# Altium PCB NexitonAdapterBoard.PcbDoc
Units mil, origin at the board's own origin, x right, y up, seen from the top; angles counter-clockwise.
Board outline 960 x 1060 mil, 2 copper layers (Top Layer, Bottom Layer); 16 components, 20 nets, 50 pads, 1 vias.
Unrouted connection lines stored in the file: 10.
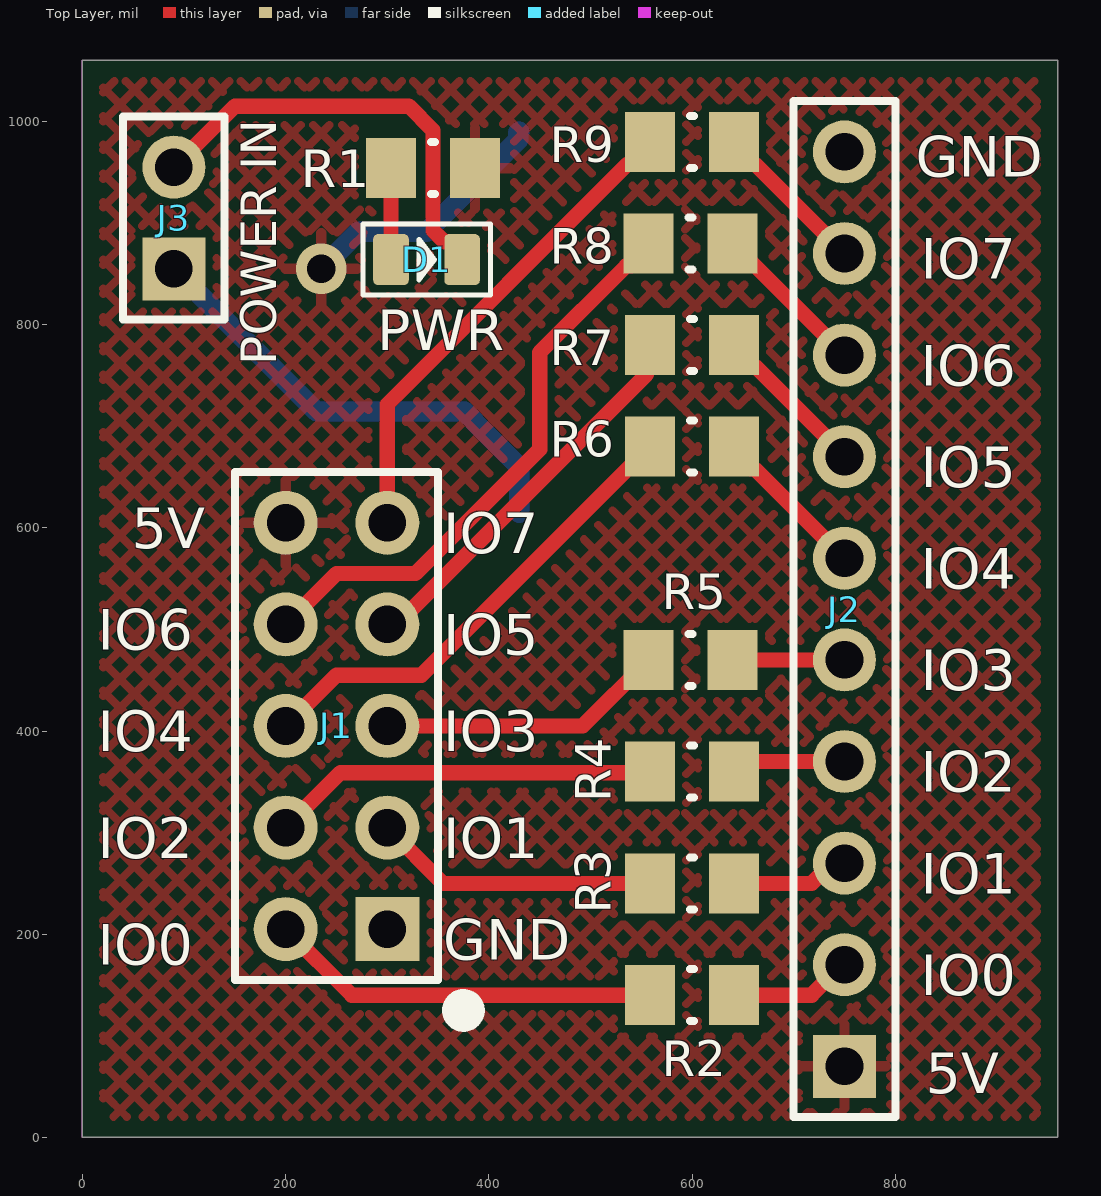
[diagram p0: Top Layer view]
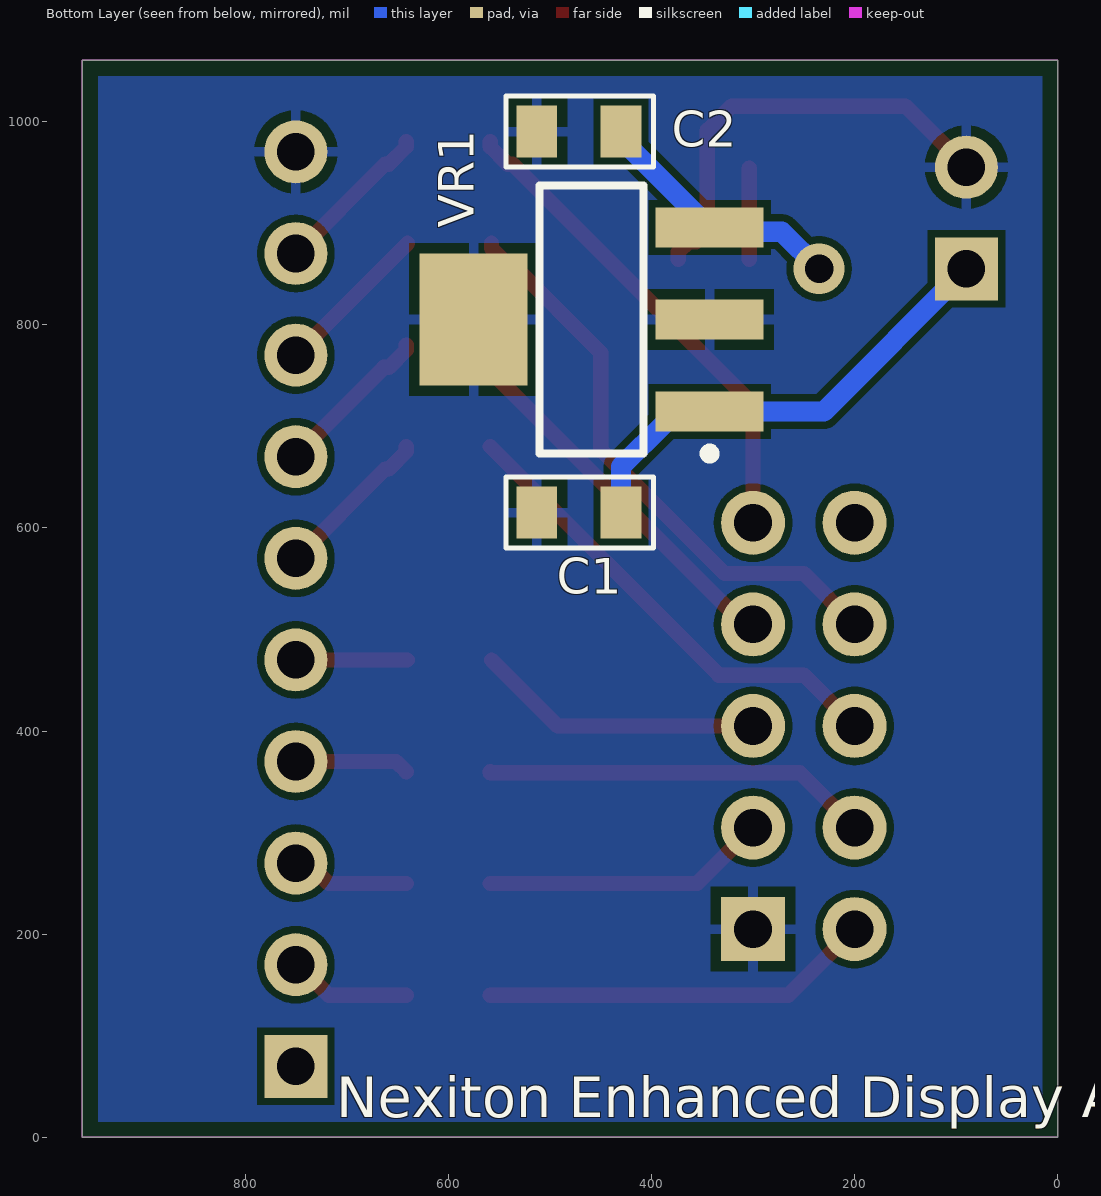
[diagram p1: Bottom Layer view, seen from below]

## Layer stack, top to bottom
Top Solder: solder mask 0.4, Solder Resist, Dk 3.5
Top Layer: signal copper 1.4
Dielectric 1: dielectric 12.6, FR-4, Dk 4.8
Bottom Layer: signal copper 1.4
Bottom Solder: solder mask 0.4, Solder Resist, Dk 3.5

## Board outline
0,0 960,0 960,1060 0,1060

## Design rules (kind name [scope] priority, off if disabled: settings)
BoardOutlineClearance [All] p1: gap=15 ignorepadtopadclearanceinfootprint=FALSE
Clearance [All] p1: gap=7 ignorepadtopadclearanceinfootprint=FALSE
Height [All] p1 off: minheight=0 maxheight=1000 prefheight=500
HoleSize [All] p1: absolutevalues=TRUE maxlimit=300 minlimit=1 maxpercent=80.000 minpercent=20.000
PolygonConnect [All] p1: connectstyle=Relief reliefconductorwidth=10 reliefentries=4 polygonreliefangle="90 Angle" airgapwidth=10
RoutingVias [All] p1: holewidth=28 width=50 viastyle="Through Hole" minholewidth=28 minwidth=50 maxholewidth=28 maxwidth=50
SilkToSilkClearance [All] p1 off: silktosilkclearance=10
SilkToSolderMaskClearance [IsPad] p1 off: minsilkscreentomaskgap=10 clearancetoexposedcopper=TRUE
SolderMaskExpansion [All] p1: expansion=4
Width [All] p1: maxlimit=200 minlimit=7 preferedwidth=12
26 further rules are at their usual default settings.

## Components (designator, comment, footprint, x,y, rotation, side; value= is the part's Value field where it differs from the comment)
C1 "Cap Semi" RES_0805 513,615 r180 bottom value=100n
C2 "Cap Semi" RES_0805 513,990 r180 bottom value=100n
D1 "PWR" LED-0805 338.66,864 r0 top
J1 "From Nexiton Display" HDR2X5 300,205 r90 top
J2 "Header 10" HDR1X10 750,70 r90 top
J3 "POWER IN" HDR1X2 90,855 r90 top
R1 "Res1" RESC0805(2012)_M 345,954 r180 top value=1K
R2 "Res1" RESC0805(2012)_M 600,140 r0 top value=1K
R3 "Res1" RESC0805(2012)_M 600,250 r0 top value=1K
R4 "Res1" RESC0805(2012)_M 600,360 r0 top value=1K
R5 "Res1" RESC0805(2012)_M 598.66,470 r0 top value=1K
R6 "Res1" RESC0805(2012)_M 600,680 r0 top value=1K
R7 "Res1" RESC0805(2012)_M 600,780 r0 top value=1K
R8 "Res1" RESC0805(2012)_M 598.66,880 r0 top value=1K
R9 "Res1" RESC0805(2012)_M 600,980 r0 top value=1K
VR1 "LDL1117S50R" SOT223_M 458.86,805 r0 bottom

## Footprints (in the part's own frame and the unit in brackets; to place one, negate y for a bottom-side part, rotate by r counter-clockwise, add the part's x,y. Pads: shape width x height; smd on the part's side, far side on the other; paste and mask are expansions set on the pad)
HDR1X2 [mil] "Connector; Header; 2 Position"
  rect 62x62 hole 37: 1(0,0)
  round 62 hole 37: 2(100,0)
  silkscreen extent -50,-50 150,50
HDR1X10 [mil] "Connector; Header; 10 Position"
  rect 62x62 hole 37: 1(0,0)
  round 62 hole 37: 2(100,0) 3(200,0) 4(300,0) 5(400,0) 6(500,0) 7(600,0) 8(700,0) 9(800,0) 10(900,0)
  silkscreen extent -50,-50 950,50
HDR2X5 [mil] "Connector; Header; 5x2 Position"
  rect 63x63 hole 37: 1(0,0)
  round 63 hole 37: 2(0,100) 3(100,0) 4(100,100) 5(200,0) 6(200,100) 7(300,0) 8(300,100) 9(400,0) 10(400,100)
  silkscreen extent -50,-50 450,150
LED-0805 [mil]
  rrect25% 35x50 smd: 1(-35,0) 2(35,0)
  silkscreen extent -62,-35 63,35
RES_0805 [mil]
  rect 40x51 smd: 1(0,0) 2(83,0)
  silkscreen extent -30,-35 115,35
RESC0805(2012)_M [mm] "Chip Resistor, Body 2.0x1.3mm, IPC Low Density"
  rect 1.25x1.5 smd: 1(-1.05,0) 2(1.05,0)
  silkscreen extent -0.05,-0.65 0.05,0.65, body extent -1.1,-0.67 1.1,0.67, height 0.7
SOT223_M [mm]
  rect 2.7x1 smd: 1(-2.95,2.3) 2(-2.95,0) 3(-2.95,-2.3)
  rect 2.7x3.3 smd: 4(2.95,0)
  silkscreen extent -3.07,-3.35 1.3,3.47, body extent -1.85,-3.35 1.85,3.35, height 1.7

## Part data
C1 C2: "Capacitor (Semiconductor SIM Model)", LatestRevisionDate=29-May-2009, LatestRevisionNote="IPC-7351 Footprint Added.", PackageDescription="Chip Capacitor", PackageReference=C1206, Published=8-Jun-2000, Publisher="Altium Limited"
D1: library part LED0, LatestRevisionDate=08-Jul-2005, LatestRevisionNote="Mech Layer 1 removed.", PackageDescription="LED; 2 Leads", PackageReference=LED-0, Published=8-Jun-2000, Publisher="Altium Limited"
J1: library part "Header 5X2", "Header, 5-Pin, Dual row", LatestRevisionDate=17-Jul-2002, LatestRevisionNote="Re-released for DXP Platform.", Publisher="Altium Limited"
J2: "Header, 10-Pin", LatestRevisionDate=17-Jul-2002, LatestRevisionNote="Re-released for DXP Platform.", Publisher="Altium Limited"
J3: library part "Header 2", "Header, 2-Pin", LatestRevisionDate=17-Jul-2002, LatestRevisionNote="Re-released for DXP Platform.", Publisher="Altium Limited"
R1 R2 R3 R4 R5 R6 R7 R8 R9: "Resistor", LatestRevisionDate=17-Jul-2002, LatestRevisionNote="Re-released for DXP Platform.", PackageDescription="Axial Device, Thru-Hole; 2 Leads; 0.3 in Pin Spacing", PackageReference=AXIAL-0.3, Published=8-Jun-2000, Publisher="Altium Limited"
VR1: library part LM317, "Fixed 5V Voltage Regulator", MFR=TI, MPN=LM340MP-5.0, ComponentLink1Description=Datasheet, ComponentLink1URL=http://www.ti.com/general/docs/lit/getliterature.tsp?genericPartNumber=tlv1117-50&fileType=pdf

## Via types
v1: diameter 50, hole 28, Top Layer to Bottom Layer, tented both sides, 1 vias

## Nets (pads, with @x,y where several pads share a name; then routed paths per layer and width w, separated by ;. In a path a pad name is that pad's centre, name@x,y a point inside that pad or via, vN(x,y) a via of type N, cw(c..) or ccw(c..) an arc to the next point about the centre after c; other vN are vias at no path point)
5V: C2.2 J1.10 J2.1 R1.1 VR1.3 | length 255.1
  Bottom Layer w20: v1(235,855) 271.5,891.5 338.67,891.5 VR1.3 429,981.83 429,989 C2.2
GND: C1.1 C2.1 D1.2 J1.1 J2.10 J3.2 VR1.2 VR1.4 | length 433.2
  Top Layer w15: J3.2 150,1015 321.21,1015 345,991.21 345,892.66 356.16,881.5 363.66,881.5 373.66,871.5 D1.2
IO0: J1.2 R2.1 | length 385.6
  Top Layer w15: J1.2 265,140 R2.1
IO1: J1.3 R3.1 | length 281.4
  Top Layer w15: J1.3 355,250 R3.1
IO2: J1.4 R4.1 | length 382
  Top Layer w15: J1.4 254,359 558.66,359 R4.1
IO3: J1.5 R5.1 | length 284.2
  Top Layer w15: J1.5 492.32,405 R5.1
IO4: J1.6 R6.1 | length 472.6
  Top Layer w15: J1.6 250,455 333.66,455 R6.1
IO5: J1.7 R7.1 | length 387.4
  Top Layer w15: J1.7 309.02,505 555,750.98 555,776.34 R7.1
IO6: J1.8 R8.1 | length 571.5
  Top Layer w15: J1.8 250,555 327.91,555 450,677.09 450,772.68 535.3,857.97 540.22,857.97 557.32,875.08 R8.1
IO7: J1.9 R9.1 | length 485
  Top Layer w15: J1.9 300,721.34 536.63,957.97 541.56,957.97 558.66,975.08 R9.1
NetD1_1: D1.1 R1.2 | length 90
  Top Layer w15: D1.1 R1.2
NetJ2_2: J2.2 R2.2 | length 121.1
  Top Layer w15: R2.2 717.71,140 747.71,170 J2.2
NetJ2_3: J2.3 R3.2 | length 116.9
  Top Layer w15: R3.2 717.71,250 737.71,270 J2.3
NetJ2_4: J2.4 R4.2 | length 112.8
  Top Layer w15: R4.2 651.34,370 J2.4
NetJ2_5: J2.5 R5.2 | length 110
  Top Layer w15: R5.2 J2.5
NetJ2_6: J2.6 R6.2 | length 157.1
  Top Layer w15: R6.2 641.34,675.08 658.44,657.97 662.03,657.97 J2.6
NetJ2_7: J2.7 R7.2 | length 157.9
  Top Layer w15: R7.2 641.34,775.08 658.44,757.97 663.37,757.97 750,671.34 J2.7
NetJ2_8: J2.8 R8.2 | length 155.6
  Top Layer w15: R8.2 J2.8
NetJ2_9: J2.9 R9.2 | length 157.1
  Top Layer w15: R9.2 641.34,975.08 658.44,957.97 662.03,957.97 J2.9
VIN: C1.2 J3.1 VR1.1 | length 466.1
  Bottom Layer w20: J3.1 230.55,714.45 VR1.1 376.18,714.45 385.87,704.76 385.87,704.13 430,660 C1.2

## Polygon pours and split planes (outlines as drawn)
GND on Bottom Layer "GND_L02_P000" (solid, remove dead copper, pour order 0): 0,0 0,1060 960,1060 960,0
5V on Top Layer "5V_L01_P002" (hatched 45Degree grid 20 track 8, remove dead copper, pour order 2): 0,0 0,1060 960,1060 960,0

## Keep-outs
Keep-Out Layer:
  lines w1: 0,0 0,1060 960,1060 960,0 ; 0,0 960,0 ; 0,0 960,0

## Silkscreen, mask and mechanical layers (free items; w line width, h text height)
Top Overlay:
  circle w22: c375,125 r10
  text "GND" at 820,945.57 h40
  text "IO7" at 825,845 h40
  text "IO6" at 825,740 h40
  text "IO5" at 825,640 h40
  text "5V" at 48.32,580 h40
  text "IO7" at 355,575 h40
  text "IO4" at 825,540 h40
  text "IO6" at 15,480 h40
  text "IO5" at 355,475 h40
  text "IO3" at 825,440 h40
  text "IO4" at 15,380 h40
  text "IO3" at 355,380 h40
  text "IO2" at 825,340 h40
  text "IO2" at 15,275 h40
  text "IO1" at 355,275 h40
  text "IO1" at 825,240 h40
  text "GND" at 355,175 h40
  text "IO0" at 15,170 h40
  text "IO0" at 825,140 h40
  text "5V" at 830,43.4 h40
Bottom Overlay:
  text "Nexiton Enhanced Display Adapter" at 710,20 h40